# Altium PCB IDC_RS50_DIO.PcbDoc
Units mm, origin at the board's own origin, x right, y up, seen from the top; angles counter-clockwise.
Board outline 73 x 51 mm, 2 copper layers (Top Layer, Bottom Layer); 3 components, 41 nets, 204 pads, 0 vias.
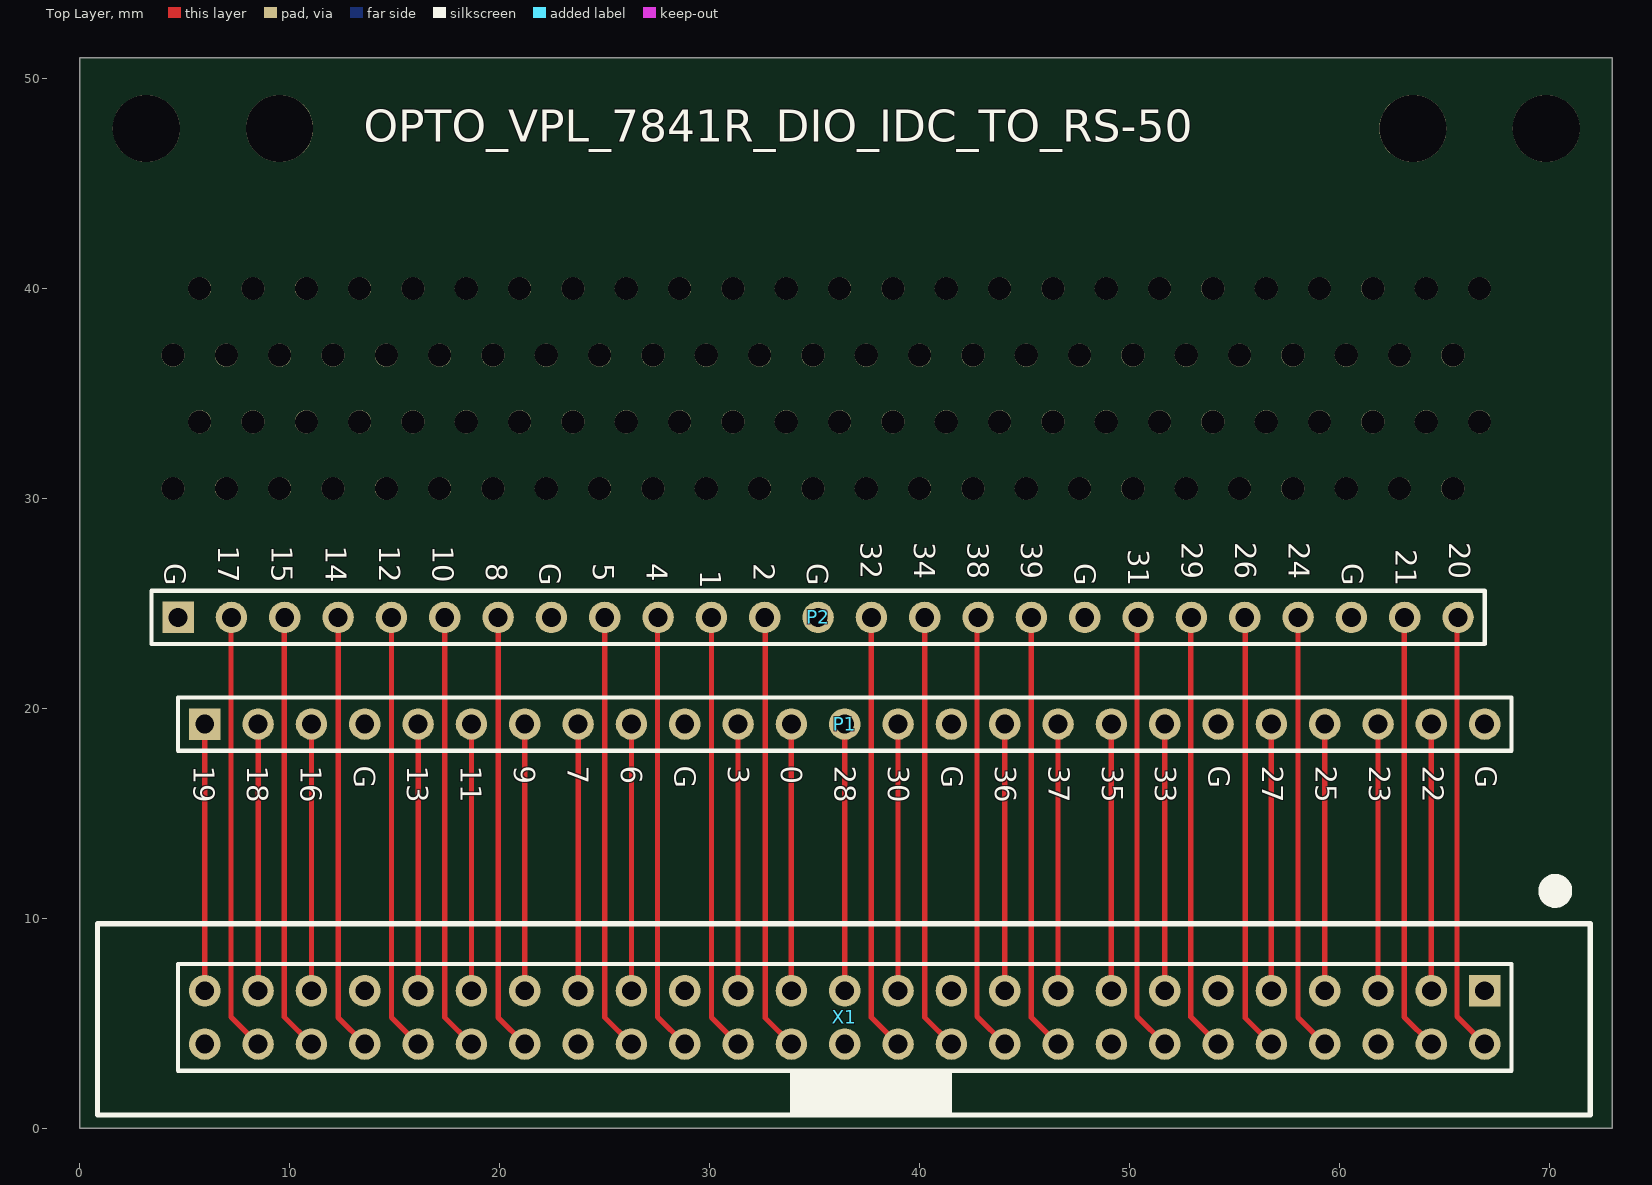
[diagram p0: Top Layer view]
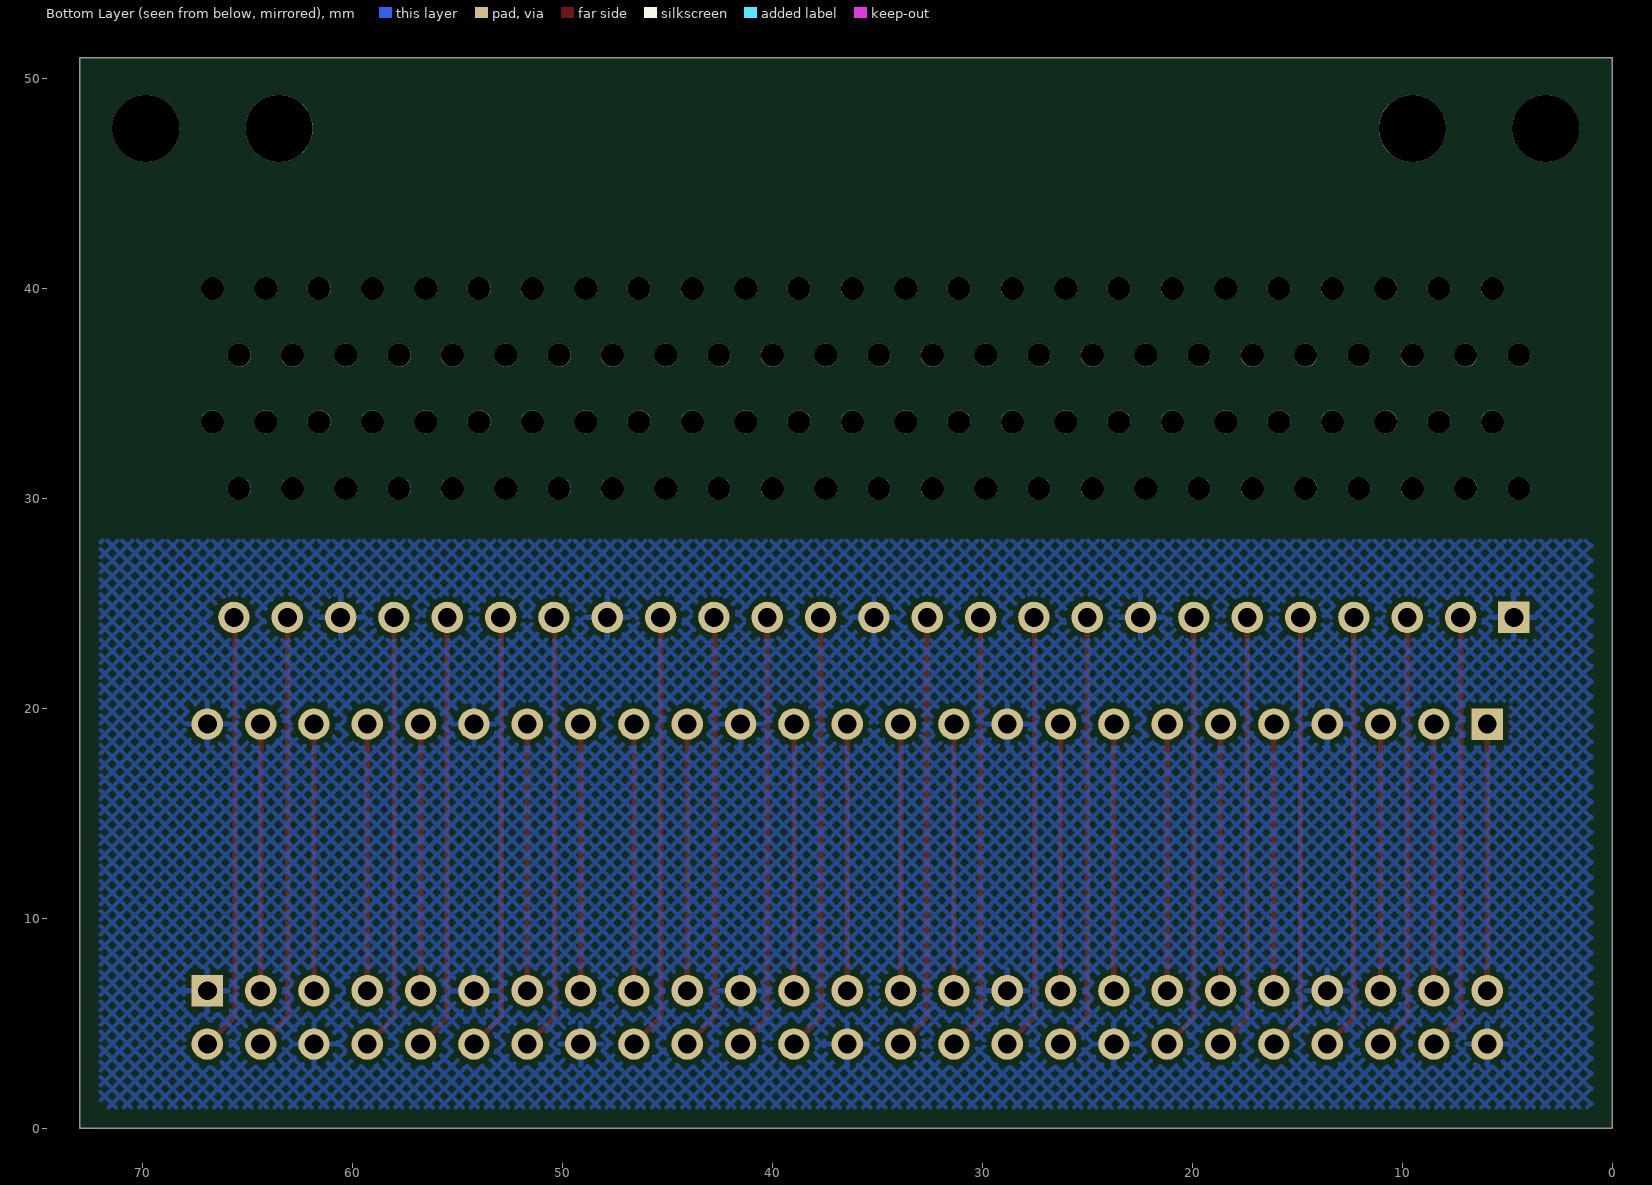
[diagram p1: Bottom Layer view, seen from below]

## Layer stack, top to bottom
Top Solder: solder mask 0.0102, Solder Resist, Dk 3.5
Top Layer: signal copper 0.0356
Dielectric 1: dielectric 0.32, FR-4, Dk 4.8
Bottom Layer: signal copper 0.0356
Bottom Solder: solder mask 0.0102, Solder Resist, Dk 3.5

## Board outline
0,0 0,51 73,51 73,0

## Design rules (kind name [scope] priority, off if disabled: settings)
Clearance [All] p1: gap=0.254 ignorepadtopadclearanceinfootprint=FALSE except(0: Arc-Hole Track-Hole SMDPad-Hole THPad-Hole Via-Hole Fill-Hole Poly-Hole Region-Hole Text-Hole)
PolygonConnect [All] p1: connectstyle=Relief reliefconductorwidth=0.254 reliefentries=4 polygonreliefangle="90 Angle" airgapwidth=0.254
RoutingVias [All] p1: holewidth=0.711 width=1.27 viastyle="Through Hole" minholewidth=0.711 minwidth=1.27 maxholewidth=0.711 maxwidth=1.27
SolderMaskExpansion [All] p1: expansion=0.102 istentingtop=FALSE
Width [All] p1: maxlimit=0.254 minlimit=0.254 preferedwidth=0.254
30 further rules are at their usual default settings.

## Components (designator, comment, footprint, x,y, rotation, side; value= is the part's Value field where it differs from the comment)
P1 "Header 25" HDR1X25 5.96,19.26 r0 top
P2 "Header 25" HDR1X25 4.69,24.34 r0 top
X1 "IDC_DIO" IDC_DIO 66.92,6.56 r180 top

## Footprints (in the part's own frame and the unit in brackets; to place one, negate y for a bottom-side part, rotate by r counter-clockwise, add the part's x,y. Pads: shape width x height; smd on the part's side, far side on the other; paste and mask are expansions set on the pad)
HDR1X25 [mm] "Connector; Header; 25 Position"
  rect 1.5x1.5 hole 0.9: 1(0,0)
  round 1.5 hole 0.9: 2(2.54,0) 3(5.08,0) 4(7.62,0) 5(10.16,0) 6(12.7,0) 7(15.24,0) 8(17.78,0) 9(20.32,0) 10(22.86,0) 11(25.4,0) 12(27.94,0) 13(30.48,0) 14(33.02,0) 15(35.56,0) 16(38.1,0) 17(40.64,0) 18(43.18,0) 19(45.72,0) 20(48.26,0) 21(50.8,0) 22(53.34,0) 23(55.88,0) 24(58.42,0) 25(60.96,0)
  silkscreen extent -1.27,-1.27 62.23,1.27
IDC_DIO [mm]
  rect 1.5x1.5 hole 0.9: 1(0,0)
  round 1.5 hole 0.9: 2(0,2.54) 3(2.54,0) 4(2.54,2.54) 5(5.08,0) 6(5.08,2.54) 7(7.62,0) 8(7.62,2.54) 9(10.16,0) 10(10.16,2.54) 11(12.7,0) 12(12.7,2.54) 13(15.24,0) 14(15.24,2.54) 15(17.78,0) 16(17.78,2.54) 17(20.32,0) 18(20.32,2.54) 19(22.86,0) 20(22.86,2.54) 21(25.4,0) 22(25.4,2.54) 23(27.94,0) 24(27.94,2.54) 25(30.48,0) 26(30.48,2.54) 27(33.02,0) 28(33.02,2.54) 29(35.56,0) 30(35.56,2.54) 31(38.1,0) 32(38.1,2.54) 33(40.64,0) 34(40.64,2.54) 35(43.18,0) 36(43.18,2.54) 37(45.72,0) 38(45.72,2.54) 39(48.26,0) 40(48.26,2.54) 41(50.8,0) 42(50.8,2.54) 43(53.34,0) 44(53.34,2.54) 45(55.88,0) 46(55.88,2.54) 47(58.42,0) 48(58.42,2.54) 49(60.96,0) 50(60.96,2.54)
  silkscreen extent -5.03,-5.14 66.07,5.92

## Part data
P1 P2: "Header, 25-Pin", LatestRevisionDate=17-Jul-2002, LatestRevisionNote="Re-released for DXP Platform.", Publisher="Altium Limited"

## Free pads (board coordinates)
  round 3.2 hole 3.2 unplated: 0(3.175,47.625) 0(9.525,47.625) 0(63.5,47.625) 0(69.85,47.625)
  round 1.1 hole 1.1 unplated: 0(4.445,30.48) 0(4.445,36.83) 0(5.715,33.655) 0(5.715,40.005) 0(6.985,30.48) 0(6.985,36.83) 0(8.255,33.655) 0(8.255,40.005) 0(9.525,30.48) 0(9.525,36.83) 0(10.795,33.655) 0(10.795,40.005) 0(12.065,30.48) 0(12.065,36.83) 0(13.335,33.655) 0(13.335,40.005) 0(14.605,30.48) 0(14.605,36.83) 0(15.875,33.655) 0(15.875,40.005) 0(17.145,30.48) 0(17.145,36.83) 0(18.415,33.655) 0(18.415,40.005) 0(19.685,30.48) 0(19.685,36.83) 0(20.955,33.655) 0(20.955,40.005) 0(22.225,30.48) 0(22.225,36.83) 0(23.495,33.655) 0(23.495,40.005) 0(24.765,30.48) 0(24.765,36.83) 0(26.035,33.655) 0(26.035,40.005) 0(27.305,30.48) 0(27.305,36.83) 0(28.575,33.655) 0(28.575,40.005) 0(29.845,30.48) 0(29.845,36.83) 0(31.115,33.655) 0(31.115,40.005) 0(32.385,30.48) 0(32.385,36.83) 0(33.655,33.655) 0(33.655,40.005) 0(34.925,30.48) 0(34.925,36.83) 0(36.195,33.655) 0(36.195,40.005) 0(37.465,30.48) 0(37.465,36.83) 0(38.735,33.655) 0(38.735,40.005) 0(40.005,30.48) 0(40.005,36.83) 0(41.275,33.655) 0(41.275,40.005) 0(42.545,30.48) 0(42.545,36.83) 0(43.815,33.655) 0(43.815,40.005) 0(45.085,30.48) 0(45.085,36.83) 0(46.355,33.655) 0(46.355,40.005) 0(47.625,30.48) 0(47.625,36.83) 0(48.895,33.655) 0(48.895,40.005) 0(50.165,30.48) 0(50.165,36.83) 0(51.435,33.655) 0(51.435,40.005) 0(52.705,30.48) 0(52.705,36.83) 0(53.975,33.655) 0(53.975,40.005) 0(55.245,30.48) 0(55.245,36.83) 0(56.515,33.655) 0(56.515,40.005) 0(57.785,30.48) 0(57.785,36.83) 0(59.055,33.655) 0(59.055,40.005) 0(60.325,30.48) 0(60.325,36.83) 0(61.595,33.655) 0(61.595,40.005) 0(62.865,30.48) 0(62.865,36.83) 0(64.135,33.655) 0(64.135,40.005) 0(65.405,30.48) 0(65.405,36.83) 0(66.675,33.655) 0(66.675,40.005)

## Nets (pads, with @x,y where several pads share a name; then routed paths per layer and width w, separated by ;. In a path a pad name is that pad's centre, name@x,y a point inside that pad or via, vN(x,y) a via of type N, cw(c..) or ccw(c..) an arc to the next point about the centre after c; other vN are vias at no path point)
D0: P1.12 X1.27 | length 12.7
  Top Layer w0.254: X1.27 P1.12
D1: P2.11 X1.30 | length 20.8
  Top Layer w0.254: P2.11 30.09,8.338 30.09,5.29 X1.30
D2: P2.12 X1.28 | length 20.8
  Top Layer w0.254: P2.12@32.655,24.34 32.655,9.456 32.655,5.265 X1.28
D3: P1.11 X1.29 | length 12.7
  Top Layer w0.254: X1.29 P1.11
D4: P2.10 X1.32 | length 20.9
  Top Layer w0.254: P2.10@27.525,24.34 27.525,9.354 27.525,5.315 X1.32
D5: P2.9 X1.34 | length 20.8
  Top Layer w0.254: P2.9 25.01,8.922 25.01,5.29 X1.34
D6: P1.9 X1.33 | length 12.7
  Top Layer w0.254: X1.33 P1.9
D7: P1.8 X1.35 | length 12.7
  Top Layer w0.254: X1.35 P1.8
D8: P2.7 X1.38 | length 20.8
  Top Layer w0.254: P2.7 19.93,8.897 19.93,5.29 X1.38
D9: P1.7 X1.37 | length 12.7
  Top Layer w0.254: X1.37 P1.7
D10: P2.6 X1.40 | length 20.8
  Top Layer w0.254: P2.6 17.39,7.881 17.39,5.29 X1.40
D11: P1.6 X1.39 | length 12.7
  Top Layer w0.254: X1.39 P1.6
D12: P2.5 X1.42 | length 20.8
  Top Layer w0.254: P2.5 14.85,7.627 14.85,5.29 X1.42
D13: P1.5 X1.41 | length 12.7
  Top Layer w0.254: X1.41 P1.5
D14: P2.4 X1.44 | length 20.8
  Top Layer w0.254: P2.4 12.31,7.957 12.31,5.29 X1.44
D15: P2.3 X1.46 | length 20.9
  Top Layer w0.254: P2.3@9.745,24.34 9.745,5.315 X1.46
D16: P1.3 X1.45 | length 12.7
  Top Layer w0.254: X1.45 P1.3
D17: P2.2 X1.48 | length 20.9
  Top Layer w0.254: P2.2@7.205,24.34 7.205,7.805 7.205,5.315 X1.48
D18: P1.2 X1.47 | length 12.7
  Top Layer w0.254: X1.47 P1.2
D19: P1.1 X1.49 | length 12.7
  Top Layer w0.254: X1.49 P1.1
D20: P2.25 X1.2 | length 20.9
  Top Layer w0.254: P2.25@65.599,24.34 65.599,7.525 65.599,5.341 X1.2
D21: P2.24 X1.4 | length 20.9
  Top Layer w0.254: P2.24@63.085,24.34 63.085,7.449 63.085,5.315 X1.4
D22: P1.24 X1.3 | length 12.7
  Top Layer w0.254: X1.3 P1.24
D23: P1.23 X1.5 | length 12.7
  Top Layer w0.254: X1.5 P1.23
D24: P2.22 X1.8 | length 20.8
  Top Layer w0.254: P2.22 58.03,7.424 58.03,5.29 X1.8
D25: P1.22 X1.7 | length 12.7
  Top Layer w0.254: X1.7 P1.22
D26: P2.21 X1.10 | length 20.8
  Top Layer w0.254: P2.21@55.515,24.34 55.515,8.948 55.515,5.265 X1.10
D27: P1.21 X1.9 | length 12.7
  Top Layer w0.254: X1.9 P1.21
D28: P1.13 X1.25 | length 12.7
  Top Layer w0.254: X1.25 P1.13
D29: P2.20 X1.12 | length 20.9
  Top Layer w0.254: P2.20@52.925,24.34 52.925,7.881 52.925,5.315 X1.12
D30: P1.14 X1.23 | length 12.7
  Top Layer w0.254: X1.23 P1.14
D31: P2.19 X1.14 | length 20.9
  Top Layer w0.254: P2.19@50.359,24.34 50.359,7.576 50.359,5.341 X1.14
D32: P2.14 X1.24 | length 20.8
  Top Layer w0.254: P2.14 37.71,8.617 37.71,5.29 X1.24
D33: P1.19 X1.13 | length 12.7
  Top Layer w0.254: X1.13 P1.19
D34: P2.15 X1.22 | length 20.8
  Top Layer w0.254: P2.15 40.25,7.525 40.25,5.29 X1.22
D35: P1.18 X1.15 | length 12.7
  Top Layer w0.254: X1.15 P1.18
D36: P1.16 X1.19 | length 12.7
  Top Layer w0.254: X1.19 P1.16
D37: P1.17 X1.17 | length 12.7
  Top Layer w0.254: X1.17 P1.17
D38: P2.16 X1.20 | length 20.9
  Top Layer w0.254: P2.16@42.739,24.34 42.739,7.728 42.739,5.341 X1.20
D39: P2.17 X1.18 | length 20.8
  Top Layer w0.254: P2.17 45.33,8.44 45.33,5.29 X1.18
GND: P1.4 P1.10 P1.15 P1.20 P1.25 P2.1 P2.8 P2.13 P2.18 P2.23 X1.1 X1.6 X1.11 X1.16 X1.21 X1.26 X1.31 X1.36 X1.43 X1.50

## Polygon pours and split planes (outlines as drawn)
GND on Bottom Layer "GND_L02_P000" (hatched 45Degree grid 0.508 track 0.203, remove dead copper, pour order 0): 1,28 1,1 72,1 72,28

## Silkscreen, mask and mechanical layers (free items; w line width, h text height)
Top Overlay:
  text "OPTO_VPL_7841R_DIO_IDC_TO_RS-50" at 13.52,46.99 h1.52
Mechanical 1:
  the board outline again, w0.254

## Text inside footprints (layer, text, board x,y; h text height)
X1: Top Overlay "G" at 66.505,17.282 h1 r270; Top Overlay "20" at 65.235,27.916 h1 r270; Top Overlay "21" at 62.686,27.583 h1 r270; Top Overlay "22" at 63.961,17.282 h1 r270; Top Overlay "G" at 60.138,26.917 h1 r270; Top Overlay "23" at 61.416,17.282 h1 r270; Top Overlay "24" at 57.589,27.916 h1 r270; Top Overlay "25" at 58.872,17.282 h1 r270; Top Overlay "26" at 55.04,27.916 h1 r270; Top Overlay "27" at 56.327,17.282 h1 r270; Top Overlay "29" at 52.491,27.916 h1 r270; Top Overlay "G" at 53.782,17.282 h1 r270; Top Overlay "31" at 49.942,27.583 h1 r270; Top Overlay "33" at 51.238,17.282 h1 r270; Top Overlay "G" at 47.393,26.917 h1 r270; Top Overlay "35" at 48.693,17.282 h1 r270; Top Overlay "39" at 44.845,27.916 h1 r270; Top Overlay "37" at 46.148,17.282 h1 r270; Top Overlay "38" at 42.296,27.916 h1 r270; Top Overlay "36" at 43.604,17.282 h1 r270; Top Overlay "34" at 39.747,27.916 h1 r270; Top Overlay "G" at 41.059,17.282 h1 r270; Top Overlay "32" at 37.198,27.916 h1 r270; Top Overlay "30" at 38.515,17.282 h1 r270; Top Overlay "G" at 34.649,26.917 h1 r270; Top Overlay "28" at 35.97,17.282 h1 r270; Top Overlay "2" at 32.1,26.917 h1 r270; Top Overlay "0" at 33.425,17.282 h1 r270; Top Overlay "1" at 29.552,26.583 h1 r270; Top Overlay "3" at 30.881,17.282 h1 r270; Top Overlay "4" at 27.003,26.917 h1 r270; Top Overlay "G" at 28.336,17.282 h1 r270; Top Overlay "5" at 24.454,26.917 h1 r270; Top Overlay "6" at 25.792,17.282 h1 r270; Top Overlay "G" at 21.905,26.917 h1 r270; Top Overlay "7" at 23.247,17.282 h1 r270; Top Overlay "8" at 19.356,26.917 h1 r270; Top Overlay "9" at 20.702,17.282 h1 r270; Top Overlay "10" at 16.807,27.75 h1 r270; Top Overlay "11" at 18.158,17.282 h1 r270; Top Overlay "12" at 14.259,27.75 h1 r270; Top Overlay "13" at 15.613,17.282 h1 r270; Top Overlay "14" at 11.71,27.75 h1 r270; Top Overlay "G" at 13.069,17.282 h1 r270; Top Overlay "15" at 9.161,27.75 h1 r270; Top Overlay "16" at 10.524,17.282 h1 r270; Top Overlay "17" at 6.612,27.75 h1 r270; Top Overlay "18" at 7.979,17.282 h1 r270; Top Overlay "G" at 4.063,26.917 h1 r270; Top Overlay "19" at 5.435,17.282 h1 r270